# Altium PCB PCB1.PcbDoc (part 5 of 6)
Units mm, origin at the board's own origin, x right, y up, seen from the top; angles counter-clockwise.
Board outline 1473.2 x 504.06 mm, 4 copper layers (Top Layer, MidLayer1, MidLayer2, Bottom Layer); 162 components, 222 nets, 4894 pads, 2213 vias.
Unrouted connection lines stored in the file: 216.
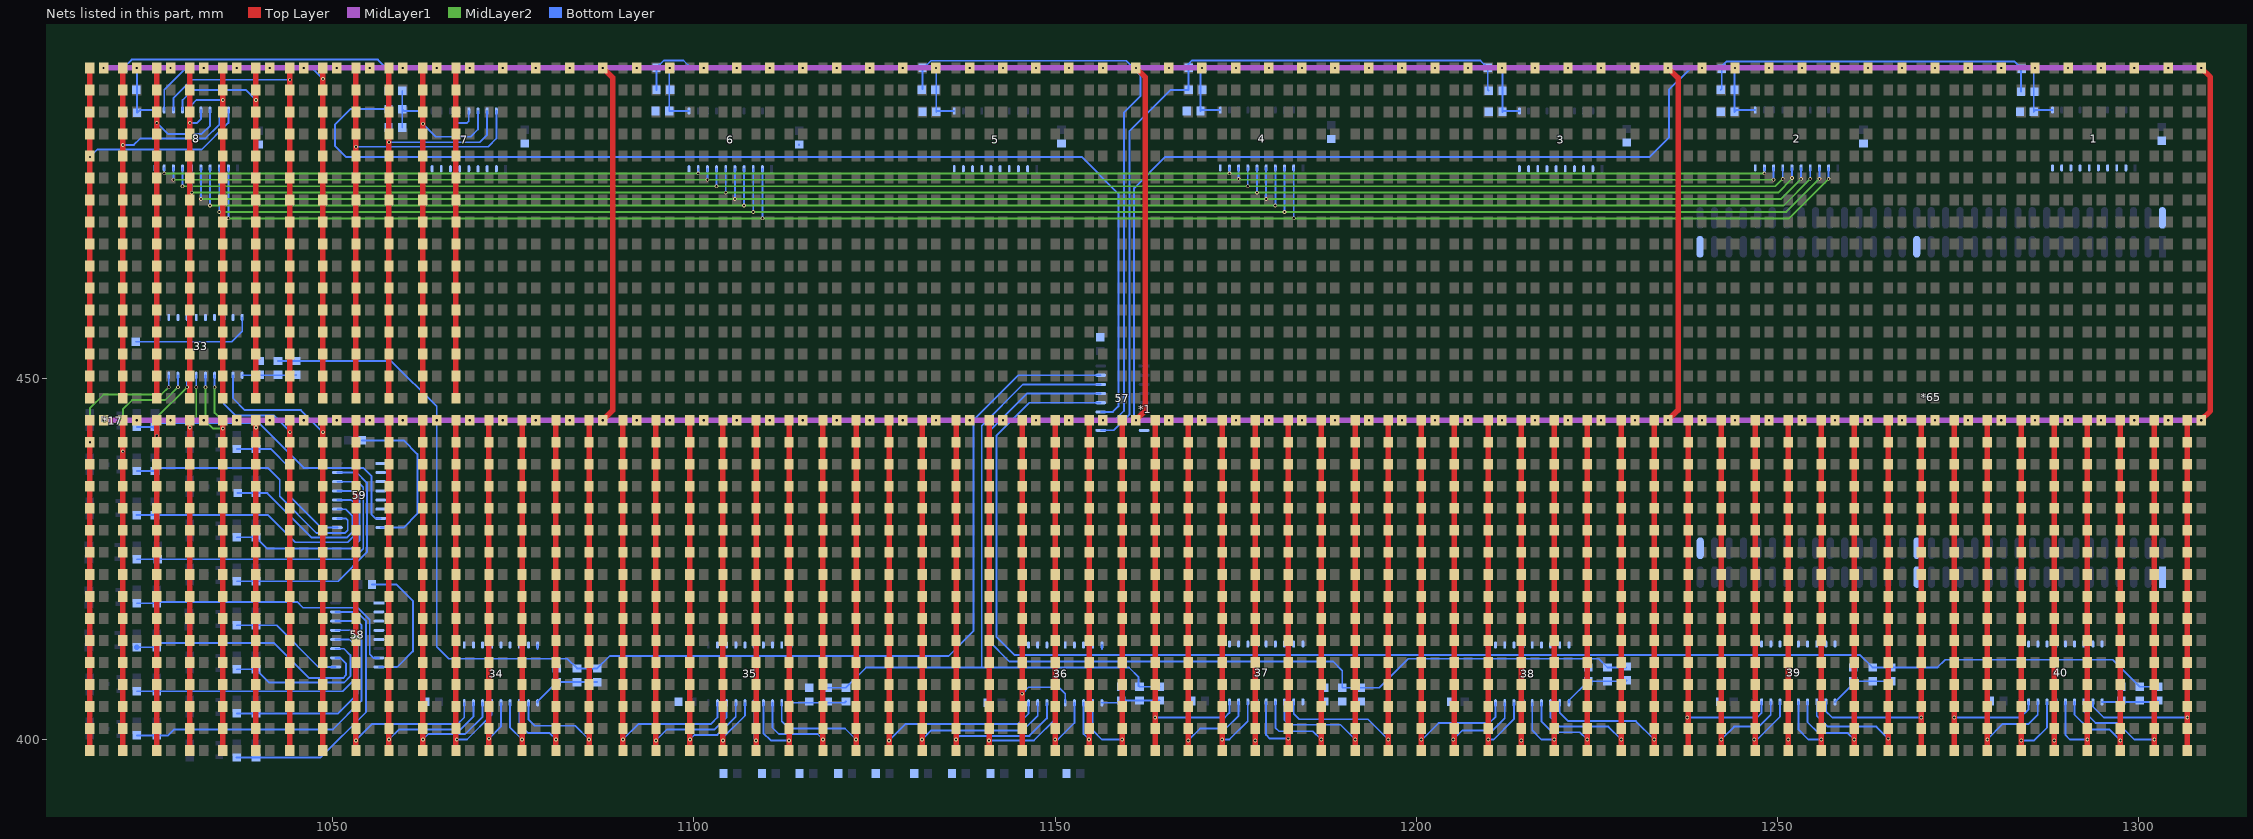
[diagram p7: the nets of this part, all layers, seen from the top]

## Via types
v1: diameter 0.508, hole 0.305, Top Layer to MidLayer1, 2032 vias
v2: diameter 0.508, hole 0.305, Top Layer to Bottom Layer, 143 vias
v3: diameter 0.508, hole 0.305, MidLayer2 to Bottom Layer, 38 vias

## Nets (pads, with @x,y where several pads share a name; then routed paths per layer and width w, separated by ;. In a path a pad name is that pad's centre, name@x,y a point inside that pad or via, vN(x,y) a via of type N, cw(c..) or ccw(c..) an arc to the next point about the centre after c; other vN are vias at no path point) (continued)
AOD15: *1.80 *17.1 | length 780.1
  Top Layer w0.762: v1(1087.379,444.246) 1088.771,445.638 1088.771,491.622 v1(1087.379,493.014) ; v1(1161.166,444.246) 1162.441,445.521 1162.441,491.739 v1(1161.166,493.014) ; v1(1234.826,444.246) 1236.218,445.638 1236.218,491.622 v1(1234.826,493.014) ; v1(1308.613,444.246) 1309.888,445.521 1309.888,491.739 v1(1308.613,493.014)
  MidLayer1 w0.762: v2(1018.286,444.246) v1(1022.863,444.246) v1(1027.562,444.246) v1(1032.134,444.246) v1(1036.701,444.246) v1(1041.278,444.246) v1(1045.977,444.246) v1(1050.549,444.246) v1(1055.116,444.246) v1(1059.693,444.246) v1(1064.392,444.246) v1(1068.964,444.246) v1(1073.531,444.246) v1(1078.108,444.246) v1(1082.807,444.246) v1(1087.379,444.246) v1(1092.073,444.246) v1(1096.65,444.246) v1(1101.349,444.246) v1(1105.921,444.246) v1(1110.488,444.246) v1(1115.065,444.246) v1(1119.764,444.246) v1(1124.336,444.246) v1(1128.903,444.246) v1(1133.48,444.246) v1(1138.179,444.246) v1(1142.751,444.246) v1(1147.318,444.246) v1(1151.895,444.246) v1(1156.594,444.246) v1(1161.166,444.246) v1(1165.733,444.246) v1(1170.31,444.246) v1(1175.009,444.246) v1(1179.581,444.246) v1(1184.148,444.246) v1(1188.725,444.246) v1(1193.424,444.246) v1(1197.996,444.246) v1(1202.563,444.246) v1(1207.14,444.246) v1(1211.839,444.246) v1(1216.411,444.246) v1(1220.978,444.246) v1(1225.555,444.246) v1(1230.254,444.246) v1(1234.826,444.246) v1(1239.52,444.246) v1(1244.097,444.246) v1(1248.796,444.246) v1(1253.368,444.246) v1(1257.935,444.246) v1(1262.512,444.246) v1(1267.211,444.246) v1(1271.783,444.246) v1(1276.35,444.246) v1(1280.927,444.246) v1(1285.626,444.246) v1(1290.198,444.246) v1(1294.765,444.246) v1(1299.342,444.246) v1(1304.041,444.246) v1(1308.613,444.246) ; v1(1018.286,493.014) v1(1022.863,493.014) v1(1027.562,493.014) v1(1032.134,493.014) v1(1036.701,493.014) v1(1041.278,493.014) v1(1045.977,493.014) v1(1050.549,493.014) v1(1055.116,493.014) v1(1059.693,493.014) v1(1064.392,493.014) v1(1068.964,493.014) v1(1073.531,493.014) v1(1078.108,493.014) v1(1082.807,493.014) v1(1087.379,493.014) v1(1092.073,493.014) v1(1096.65,493.014) v1(1101.349,493.014) v1(1105.921,493.014) v1(1110.488,493.014) v1(1115.065,493.014) v1(1119.764,493.014) v1(1124.336,493.014) v1(1128.903,493.014) v1(1133.48,493.014) v1(1138.179,493.014) v1(1142.751,493.014) v1(1147.318,493.014) v1(1151.895,493.014) v1(1156.594,493.014) v1(1161.166,493.014) v1(1165.733,493.014) v1(1170.31,493.014) v1(1175.009,493.014) v1(1179.581,493.014) v1(1184.148,493.014) v1(1188.725,493.014) v1(1193.424,493.014) v1(1197.996,493.014) v1(1202.563,493.014) v1(1207.14,493.014) v1(1211.839,493.014) v1(1216.411,493.014) v1(1220.978,493.014) v1(1225.555,493.014) v1(1230.254,493.014) v1(1234.826,493.014) v1(1239.52,493.014) v1(1244.097,493.014) v1(1248.796,493.014) v1(1253.368,493.014) v1(1257.935,493.014) v1(1262.512,493.014) v1(1267.211,493.014) v1(1271.783,493.014) v1(1276.35,493.014) v1(1280.927,493.014) v1(1285.626,493.014) v1(1290.198,493.014) v1(1294.765,493.014) v1(1299.342,493.014) v1(1304.041,493.014) v1(1308.613,493.014)
AOG0: 13.2 17.1 58.15 | length 37.8
  Bottom Layer w0.254: 17.1@1036.696,397.576 13.2@1039.368,397.576 1048.324,397.576 1054.608,403.86 1054.608,416.433 1053.338,417.703 58.15@1050.386,417.703
AOG1: 14.2 18.1 58.14 | length 47.4
  Bottom Layer w0.254: 18.1@1022.863,400.624 1027.242,400.624 1028.065,401.447 1050.036,401.447 1053.973,405.384 1053.973,415.925 1053.465,416.433 58.14@1050.386,416.433
AOG2: 15.2 19.1 58.13 | length 29.4
  Bottom Layer w0.254: 19.1@1036.701,403.672 1050.737,403.672 1053.465,406.4 1053.465,414.528 1052.83,415.163 58.13@1050.386,415.163
AOG3: 16.2 20.1 58.12 | length 38.5
  Bottom Layer w0.254: 20.1@1022.863,406.72 1051.372,406.72 1052.957,408.305 1052.957,413.258 1052.322,413.893 58.12@1050.386,413.893
AOG4: 25.2 29.1 58.11 | length 22.2
  Bottom Layer w0.254: 29.1@1036.701,409.768 25.2@1039.368,409.768 1041.212,407.924 1051.56,407.924 1052.449,408.813 1052.449,411.734 1051.56,412.623 58.11@1050.386,412.623
AOG5: 26.2 30.1 58.10 | length 34.7
  Bottom Layer w0.254: 26.2@1022.863,412.816 30.1@1025.652,412.816 1026.221,413.385 1041.908,413.385 1046.734,408.559 1051.433,408.559 1051.814,408.94 1051.814,410.591 1051.052,411.353 58.10@1050.386,411.353
AOG6: 27.2 31.1 58.9 | length 16.1
  Bottom Layer w0.254: 31.1@1036.701,415.864 27.2@1039.368,415.864 1042.223,415.864 1048.004,410.083 58.9@1050.386,410.083
AOG7: 28.2 32.1 58.7 | length 39.6
  Bottom Layer w0.254: 32.1@1022.863,418.912 28.2@1025.652,418.912 1025.84,419.1 1045.073,419.1 1045.879,418.294 1053.465,418.294 1055.116,416.643 1055.116,411.861 1055.624,411.353 58.7@1056.386,411.353
AOG8: 45.2 49.1 59.15 | length 34
  Bottom Layer w0.254: 49.1@1036.701,421.96 1050.737,421.96 1054.735,425.958 1054.735,435.61 1053.338,437.007 59.15@1050.64,437.007
AOG9: 46.2 50.1 59.14 | length 44.4
  Bottom Layer w0.254: 50.1@1022.863,425.008 1052.769,425.008 1054.227,426.466 1054.227,434.975 1053.465,435.737 59.14@1050.64,435.737
AOG10: 47.2 51.1 59.13 | length 27.6
  Bottom Layer w0.254: 51.1@1036.701,428.056 47.2@1039.368,428.056 1040.958,426.466 1052.576,426.466 1053.719,427.609 1053.719,433.705 1052.957,434.467 59.13@1050.64,434.467
AOG11: 48.2 52.1 59.12 | length 39.3
  Bottom Layer w0.254: 48.2@1022.853,431.104 1041.08,431.104 1044.829,427.355 1052.068,427.355 1053.211,428.498 1053.211,432.562 1052.576,433.197 59.12@1050.64,433.197
AOG12: 59.11 60.2 64.1 | length 23.5
  Bottom Layer w0.254: 60.2@1036.828,434.152 1040.953,434.152 1047.115,427.99 1051.941,427.99 1052.703,428.752 1052.703,431.038 1051.814,431.927 59.11@1050.64,431.927
AOG13: 59.10 61.2 65.1 | length 37.6
  Bottom Layer w0.254: 61.2@1022.863,437.2 65.1@1025.398,437.2 1025.84,437.642 1041.019,437.642 1042.67,435.991 1042.67,433.705 1047.75,428.625 1051.687,428.625 1052.068,429.006 1052.068,430.403 1051.814,430.657 59.10@1050.64,430.657
AOG14: 59.9 62.2 66.1 | length 20.7
  Bottom Layer w0.254: 62.2@1036.701,440.248 1041.461,440.248 1043.94,437.769 1043.94,433.832 1048.385,429.387 59.9@1050.64,429.387
AOG15: 59.7 63.2 67.1 | length 42.6
  Bottom Layer w0.254: 63.2@1022.863,443.296 67.1@1025.398,443.296 1025.967,443.865 1039.749,443.865 1045.972,437.642 1054.227,437.642 1055.37,436.499 1055.37,431.165 1055.878,430.657 59.7@1056.64,430.657
CLK1: 34.11 *19.2 *21.2 *.2 | length 9.6
  Bottom Layer w0.254: 34.11@1078.357,405.131 1078.357,405.323 *21.2@1081.024,407.99 *19.2@1083.818,407.99 *.2@1086.612,407.99
CLK1_: 33.11 *41.2 *43.2 *45.2 | length 7.5
  Bottom Layer w0.254: 33.11@1037.463,450.47 1044.891,450.47 *41.2@1044.956,450.535
CLK2: 36.11 *18.2 *20.2 *22.2 | length 7.9
  Bottom Layer w0.254: 36.11@1156.462,405.131 36.11@1156.462,405.131 *22.2@1159.002,405.13 ; *22.2@1159.129,405.45 *18.2@1161.669,405.45 *20.2@1164.463,405.45
CLK2_: 35.11 *42.2 *44.2 *46.2 | length 7.7
  Bottom Layer w0.254: 35.11@1113.409,405.131 1120.837,405.131 *42.2@1121.029,405.323
CLK3: 38.11 *23.2 *25.2 *27.2 | length 9.5
  Bottom Layer w0.254: 38.11@1221.105,405.131 1221.105,405.45 *27.2@1223.772,408.117 *25.2@1226.439,408.117 1228.979,408.117 *23.2@1229.106,408.244
CLK3_: 37.11 *47.2 *49.2 *51.2
CLK4: 39.11 *24.2 *26.2 *28.2 | length 9.1
  Bottom Layer w0.254: 39.11@1257.935,405.258 1260.475,407.798 *28.2@1260.475,408.117 *26.2@1263.142,408.117 *24.2@1265.682,408.117
CLK4_: 40.11 *48.2 *50.2 *52.2 | length 7.8
  Bottom Layer w0.254: 40.11@1294.892,405.258 1302.447,405.258 *48.2@1302.639,405.45
CLK5: 7.11 *29.2 *31.2 *33.2 | length 8
  Bottom Layer w0.254: *33.2@1059.622,484.759 *31.2@1059.622,487.299 ; *29.2@1059.622,489.839 *31.2@1059.622,487.299 ; 7.11@1062.482,487.044 1059.877,487.044 *31.2@1059.622,487.299
CLK5_: 8.11 *53.2 *55.2 *57.2 | length 8.9
  Bottom Layer w0.254: *53.2@1022.919,493.014 *57.2@1022.919,486.791 1023.299,487.171 8.11@1025.398,487.171
CLK6: 5.11 *30.2 *32.2 *34.2 | length 8.6
  Bottom Layer w0.254: *30.2@1133.536,493.014 *34.2@1133.536,486.918 1133.662,487.044 5.11@1136.015,487.044
CLK6_: 6.11 *54.2 *56.2 *58.2 | length 8.8
  Bottom Layer w0.254: *56.2@1096.706,493.014 1096.579,492.887 *58.2@1096.579,487.045 *58.2@1096.579,487.045 6.11@1099.312,487.044
CLK7: 3.11 *35.2 *37.2 *39.2 | length 8.6
  Bottom Layer w0.254: *35.2@1211.768,493.014 1211.895,492.887 *37.2@1211.895,489.839 *39.2@1211.895,486.918 1212.021,487.044 3.11@1214.247,487.044
CLK7_: 4.11 *59.2 *61.2 *63.2 | length 8.9
  Bottom Layer w0.254: *59.2@1170.366,493.014 1170.112,492.76 *63.2@1170.112,487.045 1170.238,487.171 4.11@1172.845,487.171
CLK8: 2.11 *36.2 *38.2 *40.2 | length 9
  Bottom Layer w0.254: *36.2@1244.153,492.887 1244.026,492.76 *38.2@1244.026,489.966 *40.2@1244.026,486.918 1244.279,487.171 2.11@1246.886,487.171
CLK8_: 1.11 *60.2 *62.2 *64.2 | length 8.8
  Bottom Layer w0.254: *62.2@1285.682,492.887 1285.428,492.633 *64.2@1285.428,486.918 1285.681,487.171 1.11@1288.034,487.171
CLKG1: 57.15 *19.1 *41.1 *43.1 *.1 | length 184.9
  Bottom Layer w0.254: *43.1@1042.416,452.435 *41.1@1044.956,452.435 1058.103,452.435 1064.387,446.151 1064.387,412.877 1066.038,411.226 1082.482,411.226 *19.1@1083.818,409.89 *.1@1086.612,409.89 1088.329,411.607 1135.253,411.607 1138.682,415.036 1138.682,444.246 1144.905,450.469 57.15@1156.304,450.469
CLKG2: 57.14 *18.1 *20.1 *42.1 *44.1 | length 101.3
  Bottom Layer w0.254: *44.1@1118.489,407.223 *42.1@1121.029,407.223 1123.823,410.017 1139.698,410.017 ; 57.14@1156.304,449.199 1145.54,449.199 1139.825,443.484 1139.825,410.144 1139.698,410.017 ; *20.1@1164.463,407.35 *18.1@1161.669,407.35 1161.542,407.477 1161.542,408.686 1160.211,410.017 1139.698,410.017
CLKG3: 57.13 *23.1 *25.1 *47.1 *49.1 | length 141.1
  Bottom Layer w0.254: 57.13@1156.304,447.929 1146.048,447.929 1140.714,442.595 1140.714,413.766 1143.635,410.845 1188.466,410.845 1189.736,409.575 *47.1@1189.736,407.223 *49.1@1192.276,407.223 1194.877,407.223 1198.88,411.226 1225.23,411.226 *25.1@1226.439,410.017 *23.1@1228.979,410.017
CLKG4: 57.12 *24.1 *26.1 *48.1 *50.1 | length 208.7
  Bottom Layer w0.254: 57.12@1156.304,446.659 1146.429,446.659 1141.857,442.087 1141.857,414.274 1144.397,411.734 1261.425,411.734 *26.1@1263.142,410.017 *24.1@1265.682,410.017 1272.093,410.017 1273.175,411.099 1296.35,411.099 *50.1@1300.099,407.35 *48.1@1302.639,407.35
CLKG5: 57.11 *29.1 *31.1 *53.1 *55.1 | length 200.9
  Bottom Layer w0.254: *55.1@1020.892,489.966 1020.892,492.887 *53.1@1021.019,493.014 1022.162,494.157 1056.259,494.157 1057.722,492.694 *29.1@1057.722,489.839 *31.1@1057.722,487.299 1052.449,487.299 1050.29,485.14 1050.29,482.219 1051.814,480.695 1153.668,480.695 1158.748,475.615 1158.748,446.151 1157.986,445.389 57.11@1156.304,445.389
CLKG6: 57.10 *30.1 *32.1 *54.1 *56.1 | length 126.2
  Bottom Layer w0.254: *54.1@1094.806,489.966 *56.1@1094.806,493.014 1095.822,494.03 1098.55,494.03 1099.566,493.014 *30.1@1131.636,493.014 ; *32.1@1131.636,490.093 *30.1@1131.636,493.014 ; 57.10@1156.304,444.119 1158.113,444.119 1159.51,445.516 1159.51,486.791 1161.796,489.077 1161.796,491.998 1159.799,493.995 1132.808,493.995 1131.827,493.014 *30.1@1131.636,493.014
CLKG7: 57.9 *35.1 *37.1 *59.1 *61.1 | length 103.5
  Bottom Layer w0.254: 57.9@1156.304,442.849 1158.113,442.849 1160.272,445.008 1160.272,484.251 1165.987,489.966 *61.1@1168.466,489.966 *59.1@1168.466,493.014 1168.466,493.588 1168.908,494.03 1208.852,494.03 *35.1@1209.868,493.014 1209.868,489.966 *37.1@1209.995,489.839
CLKG8: 57.7 *36.1 *38.1 *60.1 *62.1 | length 174.1
  Bottom Layer w0.254: 57.7@1162.304,444.119 1161.542,444.119 1160.907,444.754 1160.907,476.377 1165.225,480.695 1232.281,480.695 1234.948,483.362 1234.948,489.966 1237.869,492.887 *36.1@1242.253,492.887 ; *38.1@1242.126,489.966 1242.253,490.093 *36.1@1242.253,492.887 ; *60.1@1283.655,489.712 1283.655,492.76 *62.1@1283.782,492.887 1282.766,493.903 1242.949,493.903 1242.253,493.207 *36.1@1242.253,492.887
GND: 1.10 2.10 3.10 4.10 5.10 6.10 7.10 8.10 33.10 34.10 35.10 36.10 37.10 38.10 39.10 40.10 57.8 58.5 58.8 59.4 59.5 59.8 68.2 69.2 70.2 71.2 72.2 73.2 74.2 75.2 76.2 77.2 78.2 79.2 80.2 81.2 82.2 83.2 84.2 85.2 86.2 87.2 88.2 89.2 90.2 91.2 92.2 93.2 94.2 95.2 96.2 *21.1 *22.1 *27.1 *28.1 *33.1 *34.1 *39.1 *40.1 *45.1 *46.1 *51.1 *52.1 *57.1 *58.1 *63.1 *64.1 *65.1 *65.18 *65.34 *65.49 *65.84 *65.99 *65.132 | length 60.2
  Bottom Layer w0.254: 79.2@1022.731,455.102 1036,455.102 1037.463,456.565 33.10@1037.463,458.47 ; 96.2@1054.034,441.452 1059.815,441.452 1061.72,439.547 1061.72,431.292 1059.815,429.387 59.8@1056.64,429.387 ; 80.2@1055.431,421.513 1058.799,421.513 1061.085,419.227 1061.085,412.242 1058.926,410.083 58.8@1056.386,410.083 ; 1078.357,412.557 34.10@1078.357,413.131 ; 92.2@1114.552,482.346 92.2@1114.552,482.412 ; 1156.462,412.557 36.10@1156.462,413.131
INPUT0: 2.2 4.2 6.2 8.2 33.2 35.2 37.2 39.2 | length 246.1
  MidLayer2 w0.254: v3(1035.558,472.186) 1251.585,472.186 v3(1257.046,477.647)
  Bottom Layer w0.254: v3(1035.558,472.186) 8.2@1035.558,479.171 ; v3(1109.472,472.186) 6.2@1109.472,479.044 ; v3(1183.005,472.186) 4.2@1183.005,479.171 ; v3(1257.046,477.647) 2.2@1257.046,479.171
INPUT1: 2.3 4.3 6.3 8.3 33.3 35.3 37.3 39.3 | length 243.1
  MidLayer2 w0.254: v3(1034.288,473.075) 1251.204,473.075 v3(1255.776,477.647)
  Bottom Layer w0.254: v3(1034.288,473.075) 8.3@1034.288,479.171 ; v3(1108.202,473.075) 6.3@1108.202,479.044 ; v3(1181.735,473.075) 4.3@1181.735,479.171 ; v3(1255.776,477.647) 2.3@1255.776,479.171
INPUT2: 2.4 4.4 6.4 8.4 33.4 35.4 37.4 39.4 | length 240
  MidLayer2 w0.254: v3(1033.018,473.964) 1250.823,473.964 v3(1254.506,477.647)
  Bottom Layer w0.254: v3(1033.018,473.964) 8.4@1033.018,479.171 ; v3(1106.932,473.964) 6.4@1106.932,479.044 ; v3(1180.465,473.964) 4.4@1180.465,479.171 ; v3(1254.506,477.647) 2.4@1254.506,479.171
INPUT3: 2.5 4.5 6.5 8.5 33.5 35.5 37.5 39.5 | length 237
  MidLayer2 w0.254: v3(1031.748,474.853) 1250.442,474.853 v3(1253.236,477.647)
  Bottom Layer w0.254: v3(1031.748,474.853) 8.5@1031.748,479.171 ; v3(1105.662,474.853) 6.5@1105.662,479.044 ; v3(1179.195,474.853) 4.5@1179.195,479.171 ; v3(1253.236,477.647) 2.5@1253.236,479.171
INPUT4: 2.6 4.6 6.6 8.6 33.6 35.6 37.6 39.6 | length 234
  MidLayer2 w0.254: v3(1030.478,475.742) 1250.061,475.742 v3@1251.966,477.647
  Bottom Layer w0.254: v3(1030.478,475.742) 8.6@1030.478,479.171 ; v3(1104.392,475.742) 6.6@1104.392,479.044 ; v3(1177.925,475.742) 4.6@1177.925,479.171 ; v3@1251.966,477.647 2.6@1251.966,479.171
  other v3: 1251.966,477.774
INPUT5: 2.7 4.7 6.7 8.7 33.7 35.7 37.7 39.7 | length 230.9
  MidLayer2 w0.254: v3(1029.208,476.631) 1249.68,476.631 v3(1250.696,477.647)
  Bottom Layer w0.254: v3(1029.208,476.631) 8.7@1029.208,479.171 ; v3(1103.122,476.631) 6.7@1103.122,479.044 ; v3(1176.655,476.631) 4.7@1176.655,479.171 ; v3(1250.696,477.647) 2.7@1250.696,479.171
INPUT6: 2.8 4.8 6.8 8.8 33.8 35.8 37.8 39.8 | length 227.7
  MidLayer2 w0.254: v3(1027.938,477.52) v3(1249.426,477.52)
  Bottom Layer w0.254: v3(1027.938,477.52) 8.8@1027.938,479.171 ; v3(1101.852,477.52) 6.8@1101.852,479.044 ; v3(1175.385,477.647) 4.8@1175.385,479.171 ; v3@1249.426,477.647 2.8@1249.426,479.171
INPUT7: 2.9 4.9 6.9 8.9 33.9 35.9 37.9 39.9 | length 224.4
  MidLayer2 w0.254: v3(1026.668,478.409) v3(1248.156,478.409)
  Bottom Layer w0.254: v3(1026.668,478.409) 8.9@1026.668,479.171 ; v3(1100.582,478.409) 6.9@1100.582,479.044 ; v3(1174.115,478.409) 4.9@1174.115,479.171 ; v3(1248.156,478.409) 2.9@1248.156,479.171
INPUT8: 1.2 3.2 5.2 7.2 34.2 36.2 38.2 40.2
INPUT9: 1.3 3.3 5.3 7.3 34.3 36.3 38.3 40.3
INPUT10: 1.4 3.4 5.4 7.4 34.4 36.4 38.4 40.4
INPUT11: 1.5 3.5 5.5 7.5 34.5 36.5 38.5 40.5
INPUT12: 1.6 3.6 5.6 7.6 34.6 36.6 38.6 40.6
INPUT13: 1.7 3.7 5.7 7.7 34.7 36.7 38.7 40.7
INPUT14: 1.8 3.8 5.8 7.8 34.8 36.8 38.8 40.8
INPUT15: 1.9 3.9 5.9 7.9 34.9 36.9 38.9 40.9
Net58_1: 58.1 59.1
Net58_2: 58.2 59.2
Net58_3: 58.3 59.3
Net58_4: 58.4 59.6
Net*1_1: 33.19 *1.1 | length 67.3
  Top Layer w0.762: *1.1@1016.381,398.653 *1.1@1016.381,423.037 ; *1.1@1016.381,444.373 *1.1@1016.381,444.246 v2(1016.381,441.198) *1.1@1016.381,438.15 *1.1@1016.381,435.102 *1.1@1016.381,432.054 *1.1@1016.381,429.006 *1.1@1016.381,426.085 ; *1.1@1016.381,423.037 *1.1@1016.381,426.085 ; *1.1@1016.381,423.037 *1.1@1016.381,425.958 *1.1@1016.381,426.085
  MidLayer2 w0.254: v2(1016.381,441.198) 1016.381,445.897 1018.286,447.802 1026.287,447.802 v3(1027.303,448.818)
  Bottom Layer w0.254: v3(1027.303,448.818) 33.19@1027.303,450.47
Net*1_2: 33.18 *1.2 | length 62.1
  Top Layer w0.762: *1.2@1020.953,398.653 *1.2@1020.953,422.91 *1.2@1020.953,425.958 *1.2@1020.953,429.006 *1.2@1020.953,432.054 *1.2@1020.953,435.102 *1.2@1020.953,438.15 *1.2@1020.953,441.198 *1.2@1020.953,444.246 *1.2@1020.953,444.373
  MidLayer2 w0.254: v2(1020.953,439.928) 1020.953,445.77 1022.223,447.04 1026.795,447.04 v3(1028.573,448.818)
  Bottom Layer w0.254: v3(1028.573,448.818) 33.18@1028.573,450.47
Net*1_3: 33.17 *1.3 | length 55.8
  Top Layer w0.762: *1.3@1025.652,398.653 *1.3@1025.652,422.91 *1.3@1025.652,425.958 *1.3@1025.652,429.006 *1.3@1025.652,432.054 *1.3@1025.652,435.102 *1.3@1025.652,438.15 *1.3@1025.652,441.198 *1.3@1025.652,444.246 *1.3@1025.652,444.373
  MidLayer2 w0.254: v2(1025.652,442.087) 1025.652,444.627 v3(1029.843,448.818)
  Bottom Layer w0.254: v3(1029.843,448.818) 33.17@1029.843,450.47
Net*1_4: 33.16 *1.4 | length 53.3
  Top Layer w0.762: *1.4@1030.224,398.653 *1.4@1030.224,422.91 *1.4@1030.224,425.958 *1.4@1030.224,429.006 *1.4@1030.224,432.054 *1.4@1030.224,435.102 *1.4@1030.224,438.15 *1.4@1030.224,441.198 *1.4@1030.224,444.246 *1.4@1030.224,444.373
  MidLayer2 w0.254: v2(1030.224,443.23) 1030.224,443.357 1031.113,444.246 v3(1031.113,448.818)
  Bottom Layer w0.254: v3(1031.113,448.818) 33.16@1031.113,450.47
Net*1_5: 33.15 *1.5 | length 54.9
  Top Layer w0.762: *1.5@1034.796,398.653 *1.5@1034.796,401.574 *1.5@1034.796,404.622 *1.5@1034.796,407.67 *1.5@1034.796,410.718 *1.5@1034.796,413.766 *1.5@1034.796,416.814 *1.5@1034.796,419.862 *1.5@1034.796,422.91 *1.5@1034.796,425.958 *1.5@1034.796,429.006 *1.5@1034.796,432.054 *1.5@1034.796,435.102 *1.5@1034.796,438.15 *1.5@1034.796,441.198 *1.5@1034.796,444.246 *1.5@1034.796,444.373
  MidLayer2 w0.254: v3(1032.383,448.818) 1032.383,444.119 1033.399,443.103 v2(1034.796,443.103)
  Bottom Layer w0.254: v3(1032.383,448.818) 33.15@1032.383,450.47
Net*1_6: 33.14 *1.6 | length 57.5
  Top Layer w0.762: *1.6@1039.368,398.653 *1.6@1039.368,401.574 *1.6@1039.368,404.622 *1.6@1039.368,407.67 *1.6@1039.368,410.718 *1.6@1039.368,413.766 *1.6@1039.368,416.814 *1.6@1039.368,419.862 *1.6@1039.368,422.91 *1.6@1039.368,425.958 *1.6@1039.368,429.006 *1.6@1039.368,432.054 *1.6@1039.368,435.102 *1.6@1039.368,438.15 *1.6@1039.368,441.198 *1.6@1039.368,444.246 *1.6@1039.368,444.373
  MidLayer2 w0.254: v3(1033.653,448.818) 1033.653,445.262 1034.796,444.119 1038.479,444.119 v2(1039.368,443.23)
  Bottom Layer w0.254: v3(1033.653,448.818) 33.14@1033.653,450.47
Net*1_7: 33.13 *1.7 | length 60.5
  Top Layer w0.762: *1.7@1044.067,398.653 *1.7@1044.067,401.574 *1.7@1044.067,404.622 *1.7@1044.067,407.67 *1.7@1044.067,410.718 *1.7@1044.067,413.766 *1.7@1044.067,416.814 *1.7@1044.067,419.862 *1.7@1044.067,422.91 *1.7@1044.067,425.958 *1.7@1044.067,429.006 *1.7@1044.067,432.054 *1.7@1044.067,435.102 *1.7@1044.067,438.15 *1.7@1044.067,441.198 *1.7@1044.067,444.246 *1.7@1044.067,444.373
  Bottom Layer w0.254: 33.13@1034.923,450.47 1034.923,446.532 1036.574,444.881 1041.908,444.881 1044.067,442.722 v2(1044.067,442.595)
Net*1_8: 33.12 *1.8 | length 63.3
  Top Layer w0.762: *1.8@1048.639,398.653 *1.8@1048.639,401.574 *1.8@1048.639,404.622 *1.8@1048.639,407.67 *1.8@1048.639,410.718 *1.8@1048.639,413.766 *1.8@1048.639,416.814 *1.8@1048.639,419.862 *1.8@1048.639,422.91 *1.8@1048.639,425.958 *1.8@1048.639,429.006 *1.8@1048.639,432.054 *1.8@1048.639,435.102 *1.8@1048.639,438.15 *1.8@1048.639,441.198 *1.8@1048.639,444.246 *1.8@1048.639,444.373
  Bottom Layer w0.254: 33.12@1036.193,450.47 1036.193,447.294 1037.844,445.643 1045.591,445.643 v2(1048.639,442.595)
Net*1_9: 34.19 *1.9 | length 64.1
  Top Layer w0.762: *1.9@1053.211,398.526 *1.9@1053.211,401.574 *1.9@1053.211,404.622 *1.9@1053.211,407.67 *1.9@1053.211,410.718 *1.9@1053.211,413.766 *1.9@1053.211,416.814 *1.9@1053.211,419.862 *1.9@1053.211,422.91 *1.9@1053.211,425.958 *1.9@1053.211,429.006 *1.9@1053.211,432.054 *1.9@1053.211,435.102 *1.9@1053.211,438.15 *1.9@1053.211,441.198 *1.9@1053.211,444.246
  Bottom Layer w0.254: v2(1053.211,399.923) 1055.497,402.209 1067.308,402.209 1068.197,403.098 34.19@1068.197,405.131
Net*1_10: 34.18 *1.10 | length 60.6
  Top Layer w0.762: *1.10@1057.783,398.526 *1.10@1057.783,401.574 *1.10@1057.783,404.622 *1.10@1057.783,407.67 *1.10@1057.783,410.718 *1.10@1057.783,413.766 *1.10@1057.783,416.814 *1.10@1057.783,419.862 *1.10@1057.783,422.91 *1.10@1057.783,425.958 *1.10@1057.783,429.006 *1.10@1057.783,432.054 *1.10@1057.783,435.102 *1.10@1057.783,438.15 *1.10@1057.783,441.198 *1.10@1057.783,444.246
  Bottom Layer w0.254: v2(1057.783,400.05) 1059.18,401.447 1067.689,401.447 1069.467,403.225 34.18@1069.467,405.131
Net*1_11: 34.17 *1.11 | length 57.2
  Top Layer w0.762: *1.11@1062.482,398.526 *1.11@1062.482,401.574 *1.11@1062.482,404.622 *1.11@1062.482,407.67 *1.11@1062.482,410.718 *1.11@1062.482,413.766 *1.11@1062.482,416.814 *1.11@1062.482,419.862 *1.11@1062.482,422.91 *1.11@1062.482,425.958 *1.11@1062.482,429.006 *1.11@1062.482,432.054 *1.11@1062.482,435.102 *1.11@1062.482,438.15 *1.11@1062.482,441.198 *1.11@1062.482,444.246
  Bottom Layer w0.254: v2(1062.482,400.05) 1063.244,400.812 1068.324,400.812 1070.737,403.225 34.17@1070.737,405.131
Net*1_12: 34.16 *1.12 | length 53.6
  Top Layer w0.762: *1.12@1067.054,398.526 *1.12@1067.054,401.574 *1.12@1067.054,404.622 *1.12@1067.054,407.67 *1.12@1067.054,410.718 *1.12@1067.054,413.766 *1.12@1067.054,416.814 *1.12@1067.054,419.862 *1.12@1067.054,422.91 *1.12@1067.054,425.958 *1.12@1067.054,429.006 *1.12@1067.054,432.054 *1.12@1067.054,435.102 *1.12@1067.054,438.15 *1.12@1067.054,441.198 *1.12@1067.054,444.246
  Bottom Layer w0.254: v2(1067.181,400.05) 1068.578,400.05 1072.007,403.479 34.16@1072.007,405.131
Net*1_13: 34.15 *1.13 | length 51.4
  Top Layer w0.762: *1.13@1071.626,398.526 *1.13@1071.626,401.574 *1.13@1071.626,404.622 *1.13@1071.626,407.67 *1.13@1071.626,410.718 *1.13@1071.626,413.766 *1.13@1071.626,416.814 *1.13@1071.626,419.862 *1.13@1071.626,422.91 *1.13@1071.626,425.958 *1.13@1071.626,429.006 *1.13@1071.626,432.054 *1.13@1071.626,435.102 *1.13@1071.626,438.15 *1.13@1071.626,441.198 *1.13@1071.626,444.246
  Bottom Layer w0.254: v2(1071.626,400.177) 1073.277,401.828 34.15@1073.277,405.131
Net*1_14: 34.14 *1.14 | length 51.5
  Top Layer w0.762: *1.14@1076.198,398.526 *1.14@1076.198,401.574 *1.14@1076.198,404.622 *1.14@1076.198,407.67 *1.14@1076.198,410.718 *1.14@1076.198,413.766 *1.14@1076.198,416.814 *1.14@1076.198,419.862 *1.14@1076.198,422.91 *1.14@1076.198,425.958 *1.14@1076.198,429.006 *1.14@1076.198,432.054 *1.14@1076.198,435.102 *1.14@1076.198,438.15 *1.14@1076.198,441.198 *1.14@1076.198,444.246
  Bottom Layer w0.254: 34.14@1074.547,405.131 1074.547,401.701 v2(1076.198,400.05)
Net*1_15: 34.13 *1.15 | length 54.6
  Top Layer w0.762: *1.15@1080.897,398.526 *1.15@1080.897,401.574 *1.15@1080.897,404.622 *1.15@1080.897,407.67 *1.15@1080.897,410.718 *1.15@1080.897,413.766 *1.15@1080.897,416.814 *1.15@1080.897,419.862 *1.15@1080.897,422.91 *1.15@1080.897,425.958 *1.15@1080.897,429.006 *1.15@1080.897,432.054 *1.15@1080.897,435.102 *1.15@1080.897,438.15 *1.15@1080.897,441.198 *1.15@1080.897,444.246
  Bottom Layer w0.254: 34.13@1075.817,405.131 1075.817,402.209 1077.087,400.939 1080.008,400.939 v2(1080.897,400.05)
Net*1_16: 34.12 *1.16 | length 57.5
  Top Layer w0.762: *1.16@1085.469,398.526 *1.16@1085.469,401.574 *1.16@1085.469,404.622 *1.16@1085.469,407.67 *1.16@1085.469,410.718 *1.16@1085.469,413.766 *1.16@1085.469,416.814 *1.16@1085.469,419.862 *1.16@1085.469,422.91 *1.16@1085.469,425.958 *1.16@1085.469,429.006 *1.16@1085.469,432.054 *1.16@1085.469,435.102 *1.16@1085.469,438.15 *1.16@1085.469,441.198 *1.16@1085.469,444.246
  Bottom Layer w0.254: 34.12@1077.087,405.131 1077.087,402.844 1077.976,401.955 1083.564,401.955 v2(1085.469,400.05)
Net*1_17: 35.19 *1.17 | length 79.9
  Top Layer w0.762: *1.17@1090.168,398.78 *1.17@1090.168,401.574 *1.17@1090.168,404.622 *1.17@1090.168,404.876 ; *1.17@1090.168,410.718 *1.17@1090.168,407.924 ; *1.17@1090.168,416.814 *1.17@1090.168,414.02 ; *1.17@1090.168,432.308 *1.17@1090.168,438.404 ; *1.17@1090.168,435.356 *1.17@1090.168,438.404 ; *1.17@1090.168,444.5 *1.17@1090.168,438.404 ; *1.17@1090.168,404.876 *1.17@1090.168,407.924 ; *1.17@1090.168,404.876 *1.17@1090.168,407.67 *1.17@1090.168,407.924 ; *1.17@1090.168,407.924 *1.17@1090.168,413.766 *1.17@1090.168,414.02 ; *1.17@1090.168,414.02 *1.17@1090.168,419.862 *1.17@1090.168,438.404
  Bottom Layer w0.254: v2(1090.168,400.05) 1092.327,402.209 1102.36,402.209 1103.249,403.098 35.19@1103.249,405.131
Net*1_18: 35.18 *1.18 | length 74.1
  Top Layer w0.762: *1.18@1094.74,398.78 *1.18@1094.74,401.574 *1.18@1094.74,404.622 *1.18@1094.74,404.876 ; *1.18@1094.74,407.924 *1.18@1094.74,404.876 ; *1.18@1094.74,420.116 *1.18@1094.74,417.068 ; *1.18@1094.74,429.26 *1.18@1094.74,435.356 ; *1.18@1094.74,432.308 *1.18@1094.74,435.356 ; *1.18@1094.74,444.5 *1.18@1094.74,435.356 ; *1.18@1094.74,404.876 *1.18@1094.74,417.068 ; *1.18@1094.74,417.068 *1.18@1094.74,435.356
  Bottom Layer w0.254: v2(1094.74,399.923) 1096.264,401.447 1102.868,401.447 1104.519,403.098 35.18@1104.519,405.131
Net*1_19: 35.17 *1.19 | length 58.3
  Top Layer w0.762: *1.19@1099.439,398.78 *1.19@1099.439,401.574 *1.19@1099.439,407.924 ; *1.19@1099.439,410.972 *1.19@1099.439,407.924 ; *1.19@1099.439,444.5 1099.439,435.356 *1.19@1099.439,407.924
  Bottom Layer w0.254: v2(1099.439,400.05) 1100.074,400.685 1103.249,400.685 1105.789,403.225 35.17@1105.789,405.131
Net*1_20: 35.16 *1.20 | length 61.3
  Top Layer w0.762: *1.20@1104.011,398.78 *1.20@1104.011,401.574 *1.20@1104.011,404.622 *1.20@1104.011,420.116 ; *1.20@1104.011,417.068 *1.20@1104.011,420.116 ; *1.20@1104.011,423.164 *1.20@1104.011,420.116 ; *1.20@1104.011,438.404 *1.20@1104.011,435.356 ; *1.20@1104.011,444.5 *1.20@1104.011,435.356 ; *1.20@1104.011,420.116 *1.20@1104.011,435.356
  Bottom Layer w0.254: v2(1104.011,399.923) 1104.011,400.304 1107.059,403.352 35.16@1107.059,405.131
Net*1_21: 35.15 *1.21 | length 60.2
  Top Layer w0.762: *1.21@1108.583,398.78 *1.21@1108.583,401.574 *1.21@1108.583,404.622 *1.21@1108.583,407.67 *1.21@1108.583,420.116 ; *1.21@1108.583,417.068 *1.21@1108.583,420.116 ; *1.21@1108.583,423.164 *1.21@1108.583,420.116 ; *1.21@1108.583,438.404 *1.21@1108.583,435.356 ; *1.21@1108.583,444.5 *1.21@1108.583,435.356 ; *1.21@1108.583,420.116 *1.21@1108.583,435.356
  Bottom Layer w0.254: 35.15@1108.329,405.131 1108.329,400.177 v2(1108.583,399.923)
Net*1_22: 35.14 *1.22 | length 63
  Top Layer w0.762: *1.22@1113.155,398.78 *1.22@1113.155,401.574 *1.22@1113.155,420.116 ; *1.22@1113.155,417.068 *1.22@1113.155,420.116 ; *1.22@1113.155,423.164 *1.22@1113.155,420.116 ; *1.22@1113.155,438.404 *1.22@1113.155,435.356 ; *1.22@1113.155,444.5 *1.22@1113.155,435.356 ; *1.22@1113.155,420.116 *1.22@1113.155,435.356
  Bottom Layer w0.254: 35.14@1109.599,405.131 1109.599,400.939 1110.615,399.923 v2(1113.155,399.923)
Net*1_23: 35.13 *1.23 | length 72.1
  Top Layer w0.762: *1.23@1117.854,398.78 *1.23@1117.854,401.574 *1.23@1117.854,417.068 ; *1.23@1117.854,414.02 *1.23@1117.854,417.068 ; *1.23@1117.854,420.116 *1.23@1117.854,417.068 ; *1.23@1117.854,429.26 *1.23@1117.854,435.356 ; *1.23@1117.854,432.308 *1.23@1117.854,435.356 ; *1.23@1117.854,444.5 *1.23@1117.854,435.356 ; *1.23@1117.854,417.068 *1.23@1117.854,435.356
  Bottom Layer w0.254: 35.13@1110.869,405.131 1110.869,401.701 1111.758,400.812 1117.092,400.812 v2(1117.854,400.05)
Net*1_24: 35.12 *1.24 | length 80.9
  Top Layer w0.762: *1.24@1122.426,398.78 *1.24@1122.426,401.574 *1.24@1122.426,404.622 *1.24@1122.426,404.876 ; *1.24@1122.426,407.924 *1.24@1122.426,404.876 ; *1.24@1122.426,417.068 *1.24@1122.426,414.02 ; *1.24@1122.426,420.116 *1.24@1122.426,414.02 ; *1.24@1122.426,429.26 *1.24@1122.426,435.356 ; *1.24@1122.426,432.308 *1.24@1122.426,435.356 ; *1.24@1122.426,444.5 *1.24@1122.426,435.356 ; *1.24@1122.426,404.876 *1.24@1122.426,414.02 ; *1.24@1122.426,414.02 *1.24@1122.426,435.356
  Bottom Layer w0.254: 35.12@1112.139,405.131 1112.139,402.59 1113.155,401.574 1120.902,401.574 v2(1122.426,400.05)
Net*1_25: 36.19 *1.25 | length 68.1
  Top Layer w0.762: *1.25@1126.998,398.653 *1.25@1126.998,401.574 *1.25@1126.998,404.622 1126.998,423.037 *1.25@1126.998,444.373
  Bottom Layer w0.254: v2(1126.998,399.923) 1129.284,402.209 1144.905,402.209 1146.302,403.606 36.19@1146.302,405.131
Net*1_26: 36.18 *1.26 | length 64.9
  Top Layer w0.762: *1.26@1131.57,398.653 *1.26@1131.57,401.574 *1.26@1131.57,404.622 1131.57,423.037 *1.26@1131.57,444.373
  Bottom Layer w0.254: v2(1131.57,400.05) 1132.84,401.32 1145.54,401.32 1147.572,403.352 36.18@1147.572,405.131
Net*1_27: 36.17 *1.27 | length 61.7
  Top Layer w0.762: *1.27@1136.269,398.653 *1.27@1136.269,401.574 1136.269,423.037 1136.269,435.229 *1.27@1136.269,444.373
  Bottom Layer w0.254: v2(1136.269,400.05) 1136.777,400.558 1146.429,400.558 1148.842,402.971 36.17@1148.842,405.131
Net*1_28: 36.16 *1.28 | length 58.4
  Top Layer w0.762: *1.28@1140.841,398.653 *1.28@1140.841,401.574 *1.28@1140.841,444.373
  Bottom Layer w0.254: v2(1140.841,399.923) 1147.064,399.923 1150.112,402.971 36.16@1150.112,405.131
Net*1_29: 36.15 *1.29 | length 72
  Top Layer w0.762: *1.29@1145.413,401.574 *1.29@1145.413,398.653 ; *1.29@1145.413,401.701 *1.29@1145.413,398.653 ; *1.29@1145.413,404.622 *1.29@1145.413,404.749 ; *1.29@1145.413,410.845 *1.29@1145.413,410.718 ; *1.29@1145.413,416.814 *1.29@1145.413,413.893 ; *1.29@1145.413,432.181 *1.29@1145.413,438.277 ; *1.29@1145.413,435.229 *1.29@1145.413,438.277 ; *1.29@1145.413,444.373 *1.29@1145.413,438.277 ; *1.29@1145.413,398.653 *1.29@1145.413,404.749 ; *1.29@1145.413,404.749 *1.29@1145.413,407.67 *1.29@1145.413,410.718 ; *1.29@1145.413,410.718 *1.29@1145.413,413.766 *1.29@1145.413,413.893 ; *1.29@1145.413,413.893 *1.29@1145.413,419.862 *1.29@1145.413,438.277
  Bottom Layer w0.254: v2(1145.413,406.4) 1146.302,407.289 1150.493,407.289 1151.382,406.4 36.15@1151.382,405.131
Net*1_30: 36.14 *1.30 | length 52.1
  Top Layer w0.762: *1.30@1149.985,398.653 *1.30@1149.985,401.574 *1.30@1149.985,404.622 *1.30@1149.985,444.373
  Bottom Layer w0.254: v2(1149.985,400.05) 1150.366,400.05 1152.652,402.336 36.14@1152.652,405.131
Net*1_31: 36.13 *1.31 | length 51.1
  Top Layer w0.762: *1.31@1154.684,398.653 *1.31@1154.684,401.574 *1.31@1154.684,444.373
  Bottom Layer w0.254: 36.13@1153.922,405.131 1153.922,400.812 v2(1154.684,400.05)
Net*1_32: 36.12 *1.32 | length 54.1
  Top Layer w0.762: *1.32@1159.256,398.653 *1.32@1159.256,401.574 *1.32@1159.256,444.373
  Bottom Layer w0.254: 36.12@1155.192,405.131 1155.192,401.32 1156.462,400.05 v2(1159.256,400.05)
Net*1_33: 37.19 *1.33 | length 57.8
  Top Layer w0.762: *1.33@1163.828,398.653 *1.33@1163.828,404.622 *1.33@1163.828,444.373
  Bottom Layer w0.254: v2(1163.828,403.098) 1173.48,403.098 1174.115,403.733 37.19@1174.115,405.258
Net*1_34: 37.18 *1.34 | length 56
  Top Layer w0.762: *1.34@1168.4,398.653 *1.34@1168.4,401.574 *1.34@1168.4,404.622 1168.4,423.037 *1.34@1168.4,444.373
  Bottom Layer w0.254: v2(1168.4,399.923) 1170.051,401.574 1173.607,401.574 1175.385,403.352 37.18@1175.385,405.258
Net*1_35: 37.17 *1.35 | length 53
  Top Layer w0.762: *1.35@1173.099,398.653 *1.35@1173.099,401.574 *1.35@1173.099,444.373
  Bottom Layer w0.254: v2(1173.099,400.05) 1174.115,400.05 1176.655,402.59 37.17@1176.655,405.258
Net*1_36: 37.16 *1.36 | length 51.2
  Top Layer w0.762: *1.36@1177.671,398.653 *1.36@1177.671,401.574 *1.36@1177.671,404.622 *1.36@1177.671,407.67 *1.36@1177.671,444.373
  Bottom Layer w0.254: v2(1177.671,399.923) 1177.925,400.177 37.16@1177.925,405.258
Net*1_37: 37.15 *1.37 | length 53.6
  Top Layer w0.762: *1.37@1182.243,398.653 *1.37@1182.243,401.574 *1.37@1182.243,444.373
  Bottom Layer w0.254: 37.15@1179.195,405.258 1179.195,400.685 1179.703,400.177 v2(1182.243,400.177)
Net*1_38: 37.14 *1.38 | length 56.3
  Top Layer w0.762: *1.38@1186.815,398.653 *1.38@1186.815,401.574 *1.38@1186.815,404.622 *1.38@1186.815,407.67 *1.38@1186.815,410.718 *1.38@1186.815,413.766 *1.38@1186.815,416.814 *1.38@1186.815,419.862 *1.38@1186.815,422.91 *1.38@1186.815,425.958 *1.38@1186.815,429.006 *1.38@1186.815,432.054 *1.38@1186.815,435.102 *1.38@1186.815,438.15 *1.38@1186.815,441.198 *1.38@1186.815,444.246 *1.38@1186.815,444.373
  Bottom Layer w0.254: 37.14@1180.465,405.258 1180.465,401.701 1180.973,401.193 1185.672,401.193 v2(1186.815,400.05)
Net*1_39: 37.13 *1.39 | length 59.1
  Top Layer w0.762: *1.39@1191.514,398.653 *1.39@1191.514,401.574 *1.39@1191.514,404.622 1191.514,435.229 *1.39@1191.514,444.373
  Bottom Layer w0.254: 37.13@1181.735,405.258 1181.735,402.717 1182.37,402.082 1189.482,402.082 v2(1191.514,400.05)
Net*1_40: 37.12 *1.40 | length 61.9
  Top Layer w0.762: *1.40@1196.086,398.653 *1.40@1196.086,401.574 *1.40@1196.086,404.622 1196.086,435.229 *1.40@1196.086,444.373
  Bottom Layer w0.254: 37.12@1183.005,405.258 1183.005,403.606 1183.767,402.844 1193.292,402.844 v2(1196.086,400.05)
Net*1_41: 38.19 *1.41 | length 59.2
  Top Layer w0.762: *1.41@1200.658,398.526 *1.41@1200.658,401.574 *1.41@1200.658,404.622 *1.41@1200.658,407.67 *1.41@1200.658,410.718 *1.41@1200.658,413.766 *1.41@1200.658,416.814 *1.41@1200.658,419.862 *1.41@1200.658,422.91 *1.41@1200.658,425.958 *1.41@1200.658,429.006 *1.41@1200.658,432.054 *1.41@1200.658,435.102 *1.41@1200.658,438.15 *1.41@1200.658,441.198 *1.41@1200.658,444.246
  Bottom Layer w0.254: v2(1200.658,400.05) 1200.785,400.05 1203.071,402.336 1210.056,402.336 1210.945,403.225 38.19@1210.945,405.131
Net*1_42: 38.18 *1.42 | length 56.2
  Top Layer w0.762: *1.42@1205.23,398.526 *1.42@1205.23,401.574 *1.42@1205.23,404.622 *1.42@1205.23,407.67 *1.42@1205.23,410.718 *1.42@1205.23,413.766 *1.42@1205.23,416.814 *1.42@1205.23,419.862 *1.42@1205.23,422.91 *1.42@1205.23,425.958 *1.42@1205.23,429.006 *1.42@1205.23,432.054 *1.42@1205.23,435.102 *1.42@1205.23,438.15 *1.42@1205.23,441.198 *1.42@1205.23,444.246
  Bottom Layer w0.254: v2(1205.103,400.05) 1206.373,401.32 1210.564,401.32 1212.215,402.971 38.18@1212.215,405.131
Net*1_43: 38.17 *1.43 | length 52.7
  Top Layer w0.762: *1.43@1209.929,398.526 *1.43@1209.929,401.574 *1.43@1209.929,404.622 *1.43@1209.929,407.67 *1.43@1209.929,410.718 *1.43@1209.929,413.766 *1.43@1209.929,416.814 *1.43@1209.929,419.862 *1.43@1209.929,422.91 *1.43@1209.929,425.958 *1.43@1209.929,429.006 *1.43@1209.929,432.054 *1.43@1209.929,435.102 *1.43@1209.929,438.15 *1.43@1209.929,441.198 *1.43@1209.929,444.246
  Bottom Layer w0.254: v2(1209.929,400.05) 1210.691,400.05 1213.485,402.844 38.17@1213.485,405.131
Net*1_44: 38.16 *1.44 | length 51
  Top Layer w0.762: *1.44@1214.501,398.526 *1.44@1214.501,401.574 *1.44@1214.501,404.622 *1.44@1214.501,407.67 *1.44@1214.501,410.718 *1.44@1214.501,413.766 *1.44@1214.501,416.814 *1.44@1214.501,419.862 *1.44@1214.501,422.91 *1.44@1214.501,425.958 *1.44@1214.501,429.006 *1.44@1214.501,432.054 *1.44@1214.501,435.102 *1.44@1214.501,438.15 *1.44@1214.501,441.198 *1.44@1214.501,444.246
  Bottom Layer w0.254: v2(1214.501,399.923) 1214.755,400.177 38.16@1214.755,405.131
Net*1_45: 38.15 *1.45 | length 53.1
  Top Layer w0.762: *1.45@1219.073,398.526 *1.45@1219.073,401.574 *1.45@1219.073,404.622 *1.45@1219.073,407.67 *1.45@1219.073,410.718 *1.45@1219.073,413.766 *1.45@1219.073,416.814 *1.45@1219.073,419.862 *1.45@1219.073,422.91 *1.45@1219.073,425.958 *1.45@1219.073,429.006 *1.45@1219.073,432.054 *1.45@1219.073,435.102 *1.45@1219.073,438.15 *1.45@1219.073,441.198 *1.45@1219.073,444.246
  Bottom Layer w0.254: 38.15@1216.025,405.131 1216.025,401.32 1217.295,400.05 v2(1219.073,400.05)
Net*1_46: 38.14 *1.46 | length 55.7
  Top Layer w0.762: *1.46@1223.645,398.526 *1.46@1223.645,401.574 *1.46@1223.645,404.622 *1.46@1223.645,407.67 *1.46@1223.645,410.718 *1.46@1223.645,413.766 *1.46@1223.645,416.814 *1.46@1223.645,419.862 *1.46@1223.645,422.91 *1.46@1223.645,425.958 *1.46@1223.645,429.006 *1.46@1223.645,432.054 *1.46@1223.645,435.102 *1.46@1223.645,438.15 *1.46@1223.645,441.198 *1.46@1223.645,444.246
  Bottom Layer w0.254: 38.14@1217.295,405.131 1217.295,402.59 1218.819,401.066 1222.629,401.066 v2(1223.645,400.05)
Net*1_47: 38.13 *1.47 | length 58.8
  Top Layer w0.762: *1.47@1228.344,398.526 *1.47@1228.344,401.574 *1.47@1228.344,404.622 *1.47@1228.344,407.67 *1.47@1228.344,410.718 *1.47@1228.344,413.766 *1.47@1228.344,416.814 *1.47@1228.344,419.862 *1.47@1228.344,422.91 *1.47@1228.344,425.958 *1.47@1228.344,429.006 *1.47@1228.344,432.054 *1.47@1228.344,435.102 *1.47@1228.344,438.15 *1.47@1228.344,441.198 *1.47@1228.344,444.246
  Bottom Layer w0.254: 38.13@1218.565,405.131 1218.565,403.098 1219.835,401.828 1226.566,401.828 v2(1228.344,400.05)
Net*1_48: 38.12 *1.48 | length 61.7
  Top Layer w0.762: *1.48@1232.916,398.526 *1.48@1232.916,401.574 *1.48@1232.916,404.622 *1.48@1232.916,407.67 *1.48@1232.916,410.718 *1.48@1232.916,413.766 *1.48@1232.916,416.814 *1.48@1232.916,419.862 *1.48@1232.916,422.91 *1.48@1232.916,425.958 *1.48@1232.916,429.006 *1.48@1232.916,432.054 *1.48@1232.916,435.102 *1.48@1232.916,438.15 *1.48@1232.916,441.198 *1.48@1232.916,444.246
  Bottom Layer w0.254: 38.12@1219.835,405.131 1219.835,403.733 1220.978,402.59 1230.376,402.59 v2(1232.916,400.05)
Net*1_49: 39.19 *1.49 | length 57.8
  Top Layer w0.762: *1.49@1237.615,398.78 *1.49@1237.615,404.622 *1.49@1237.615,444.5
  Bottom Layer w0.254: v2(1237.488,403.098) 1247.14,403.098 1247.775,403.733 39.19@1247.775,405.258
Net*1_50: 39.18 *1.50 | length 55.8
  Top Layer w0.762: *1.50@1242.187,398.78 *1.50@1242.187,401.574 *1.50@1242.187,404.622 1242.187,423.164 *1.50@1242.187,444.5
  Bottom Layer w0.254: v2(1242.187,400.05) 1243.965,401.828 1247.394,401.828 1249.045,403.479 39.18@1249.045,405.258
Net*1_51: 39.17 *1.51 | length 52.6
  Top Layer w0.762: *1.51@1246.886,398.78 *1.51@1246.886,401.574 *1.51@1246.886,404.622 *1.51@1246.886,444.5
  Bottom Layer w0.254: v2(1246.759,400.05) 1247.14,400.05 1250.315,403.225 39.17@1250.315,405.258
Net*1_52: 39.16 *1.52 | length 51
  Top Layer w0.762: *1.52@1251.458,398.78 *1.52@1251.458,401.574 *1.52@1251.458,404.622 *1.52@1251.458,407.67 *1.52@1251.458,444.5
  Bottom Layer w0.254: v2(1251.458,400.05) 1251.585,400.177 39.16@1251.585,405.258
Net*1_53: 39.15 *1.53 | length 53.3
  Top Layer w0.762: *1.53@1256.03,398.78 *1.53@1256.03,401.574 *1.53@1256.03,444.5
  Bottom Layer w0.254: 39.15@1252.855,405.258 1252.855,401.447 1254.252,400.05 v2(1256.03,400.05)
Net*1_54: 39.14 *1.54 | length 56
  Top Layer w0.762: *1.54@1260.602,398.78 *1.54@1260.602,401.574 *1.54@1260.602,444.5
  Bottom Layer w0.254: 39.14@1254.125,405.258 1254.125,402.463 1255.649,400.939 1259.713,400.939 v2(1260.602,400.05)
Net*1_55: 39.13 *1.55 | length 58.8
  Top Layer w0.762: *1.55@1265.301,398.78 *1.55@1265.301,401.574 *1.55@1265.301,404.622 1265.301,435.356 *1.55@1265.301,444.5
  Bottom Layer w0.254: 39.13@1255.395,405.258 1255.395,403.352 1256.919,401.828 1263.65,401.828 v2(1265.301,400.177)
Net*1_56: 39.12 *1.56 | length 60.6
  Top Layer w0.762: *1.56@1269.873,398.78 *1.56@1269.873,404.622 *1.56@1269.873,444.5
  Bottom Layer w0.254: 39.12@1256.665,405.258 1256.665,403.987 1257.554,403.098 v2(1269.873,403.098)
Net*1_57: 40.19 *1.57 | length 57.5
  Top Layer w0.762: *1.57@1274.445,398.653 *1.57@1274.445,404.622 *1.57@1274.445,444.373
  Bottom Layer w0.254: v2(1274.445,403.098) 1283.589,403.098 1284.732,404.241 40.19@1284.732,405.258
Net*1_58: 40.18 *1.58 | length 74.2
  Top Layer w0.762: *1.58@1279.017,398.653 *1.58@1279.017,401.574 *1.58@1279.017,404.622 *1.58@1279.017,407.67 *1.58@1279.017,410.718 *1.58@1279.017,413.893 ; *1.58@1279.017,416.941 *1.58@1279.017,413.893 ; *1.58@1279.017,419.989 *1.58@1279.017,413.893 ; *1.58@1279.017,429.133 *1.58@1279.017,435.229 ; *1.58@1279.017,432.181 *1.58@1279.017,435.229 ; *1.58@1279.017,444.373 *1.58@1279.017,435.229 ; *1.58@1279.017,413.893 *1.58@1279.017,435.229
  Bottom Layer w0.254: v2(1279.017,400.05) 1281.176,402.209 1284.732,402.209 1286.002,403.479 40.18@1286.002,405.258
Net*1_59: 40.17 *1.59 | length 81
  Top Layer w0.762: *1.59@1283.716,398.653 *1.59@1283.716,401.574 *1.59@1283.716,401.701 ; *1.59@1283.716,404.749 *1.59@1283.716,401.701 ; *1.59@1283.716,407.797 *1.59@1283.716,401.701 ; *1.59@1283.716,416.941 *1.59@1283.716,413.893 ; *1.59@1283.716,419.989 *1.59@1283.716,413.893 ; *1.59@1283.716,429.133 *1.59@1283.716,435.229 ; *1.59@1283.716,432.181 *1.59@1283.716,435.229 ; *1.59@1283.716,444.373 *1.59@1283.716,435.229 ; *1.59@1283.716,401.701 *1.59@1283.716,413.893 ; *1.59@1283.716,413.893 *1.59@1283.716,435.229
  Bottom Layer w0.254: v2(1283.716,399.923) 1285.494,399.923 1287.272,401.701 40.17@1287.272,405.258
Net*1_60: 40.16 *1.60 | length 69.4
  Top Layer w0.762: *1.60@1288.288,398.653 *1.60@1288.288,401.574 *1.60@1288.288,404.622 *1.60@1288.288,407.67 *1.60@1288.288,413.893 ; *1.60@1288.288,416.941 *1.60@1288.288,413.893 ; *1.60@1288.288,419.989 *1.60@1288.288,413.893 ; *1.60@1288.288,429.133 *1.60@1288.288,435.229 ; *1.60@1288.288,432.181 *1.60@1288.288,435.229 ; *1.60@1288.288,444.373 *1.60@1288.288,435.229 ; *1.60@1288.288,413.893 *1.60@1288.288,435.229
  Bottom Layer w0.254: v2(1288.288,399.923) 1288.542,400.177 40.16@1288.542,405.258
Net*1_61: 40.15 *1.61 | length 71.5
  Top Layer w0.762: *1.61@1292.86,398.653 *1.61@1292.86,401.574 *1.61@1292.86,401.701 ; *1.61@1292.86,404.622 *1.61@1292.86,401.701 ; *1.61@1292.86,413.766 *1.61@1292.86,410.845 ; *1.61@1292.86,416.814 *1.61@1292.86,416.941 ; *1.61@1292.86,422.91 *1.61@1292.86,419.989 ; *1.61@1292.86,429.006 *1.61@1292.86,426.085 ; *1.61@1292.86,444.373 *1.61@1292.86,432.054 *1.61@1292.86,426.085 ; *1.61@1292.86,401.701 *1.61@1292.86,407.67 *1.61@1292.86,407.797 ; *1.61@1292.86,407.797 *1.61@1292.86,410.718 *1.61@1292.86,410.845 ; *1.61@1292.86,407.797 *1.61@1292.86,410.845 ; *1.61@1292.86,410.845 *1.61@1292.86,416.941 ; *1.61@1292.86,416.941 *1.61@1292.86,419.862 *1.61@1292.86,419.989 ; *1.61@1292.86,416.941 *1.61@1292.86,419.989 ; *1.61@1292.86,419.989 *1.61@1292.86,425.958 *1.61@1292.86,426.085
  Bottom Layer w0.254: 40.15@1289.812,405.258 1289.812,400.685 1290.447,400.05 v2(1292.86,400.05)
Net*1_62: 40.14 *1.62 | length 67.5
  Top Layer w0.762: *1.62@1297.432,398.653 *1.62@1297.432,401.574 *1.62@1297.432,404.622 *1.62@1297.432,404.749 ; *1.62@1297.432,407.797 *1.62@1297.432,404.749 ; *1.62@1297.432,429.133 *1.62@1297.432,435.229 ; *1.62@1297.432,432.181 *1.62@1297.432,435.229 ; *1.62@1297.432,444.373 *1.62@1297.432,435.229 ; *1.62@1297.432,404.749 *1.62@1297.432,435.229
  Bottom Layer w0.254: 40.14@1291.082,405.258 1291.082,403.479 1293.114,401.447 1295.908,401.447 v2(1297.432,399.923)
Net*1_63: 40.13 *1.63 | length 58.4
  Top Layer w0.762: *1.63@1302.131,398.653 *1.63@1302.131,401.574 *1.63@1302.131,444.373
  Bottom Layer w0.254: 40.13@1292.352,405.258 1292.352,403.987 1294.003,402.336 1297.051,402.336 1299.337,400.05 v2(1302.131,400.05)
Net*1_64: 40.12 *1.64 | length 60.1
  Top Layer w0.762: *1.64@1306.703,398.653 *1.64@1306.703,404.622 *1.64@1306.703,444.373
  Bottom Layer w0.254: 40.12@1293.622,405.258 1293.622,404.622 1295.146,403.098 v2(1306.703,403.098)
Net*1_81: 8.19 *1.81 | length 68.6
  Top Layer w0.762: *1.81@1016.381,447.294 *1.81@1016.381,450.342 *1.81@1016.381,453.39 *1.81@1016.381,456.438 *1.81@1016.381,459.486 *1.81@1016.381,462.534 *1.81@1016.381,465.582 *1.81@1016.381,468.63 *1.81@1016.381,471.678 *1.81@1016.381,474.726 *1.81@1016.381,477.774 *1.81@1016.381,480.822 *1.81@1016.381,483.87 *1.81@1016.381,486.918 *1.81@1016.381,489.966 *1.81@1016.381,493.014
  Bottom Layer w0.254: v2(1016.381,480.695) 1017.397,481.711 1031.875,481.711 1035.558,485.394 8.19@1035.558,487.171
Net*1_82: 8.18 *1.82 | length 62.2
  Top Layer w0.762: *1.82@1020.953,447.294 *1.82@1020.953,450.342 *1.82@1020.953,453.39 *1.82@1020.953,456.438 *1.82@1020.953,459.486 *1.82@1020.953,462.534 *1.82@1020.953,465.582 *1.82@1020.953,468.63 *1.82@1020.953,471.678 *1.82@1020.953,474.726 *1.82@1020.953,477.774 *1.82@1020.953,480.822 *1.82@1020.953,483.87 *1.82@1020.953,486.918 *1.82@1020.953,489.966 *1.82@1020.953,493.014
  Bottom Layer w0.254: v2(1020.953,482.346) 1022.477,482.346 1023.366,483.235 1032.383,483.235 1034.288,485.14 8.18@1034.288,487.171
Net*1_83: 8.17 *1.83 | length 56.3
  Top Layer w0.762: *1.83@1025.652,447.294 *1.83@1025.652,450.342 *1.83@1025.652,453.39 *1.83@1025.652,456.438 *1.83@1025.652,459.486 *1.83@1025.652,462.534 *1.83@1025.652,465.582 *1.83@1025.652,468.63 *1.83@1025.652,471.678 *1.83@1025.652,474.726 *1.83@1025.652,477.774 *1.83@1025.652,480.822 *1.83@1025.652,483.87 *1.83@1025.652,486.918 *1.83@1025.652,489.966 *1.83@1025.652,493.014
  Bottom Layer w0.254: v2(1025.652,485.394) 1027.176,483.87 1031.875,483.87 1033.018,485.013 8.17@1033.018,487.171
Net*1_84: 8.16 *1.84 | length 48.7
  Top Layer w0.762: *1.84@1030.224,447.294 *1.84@1030.224,450.342 *1.84@1030.224,453.39 *1.84@1030.224,456.438 *1.84@1030.224,459.486 *1.84@1030.224,462.534 *1.84@1030.224,465.582 *1.84@1030.224,468.63 *1.84@1030.224,471.678 *1.84@1030.224,474.726 *1.84@1030.224,477.774 *1.84@1030.224,480.822 *1.84@1030.224,483.87 *1.84@1030.224,486.918 *1.84@1030.224,489.966 *1.84@1030.224,493.014
  Bottom Layer w0.254: v2(1030.224,485.394) 1031.24,485.394 1031.748,485.902 8.16@1031.748,487.171
Net*1_85: 8.15 *1.85 | length 51.1
  Top Layer w0.762: *1.85@1034.796,447.294 *1.85@1034.796,450.342 *1.85@1034.796,453.39 *1.85@1034.796,456.438 *1.85@1034.796,459.486 *1.85@1034.796,462.534 *1.85@1034.796,465.582 *1.85@1034.796,468.63 *1.85@1034.796,471.678 *1.85@1034.796,474.726 *1.85@1034.796,477.774 *1.85@1034.796,480.822 *1.85@1034.796,483.87 *1.85@1034.796,486.918 *1.85@1034.796,489.966 *1.85@1034.796,493.014
  Bottom Layer w0.254: 8.15@1030.478,487.171 1030.478,487.934 1031.113,488.569 v2(1034.796,488.569)
Net*1_86: 8.14 *1.86 | length 58.4
  Top Layer w0.762: *1.86@1039.368,447.294 *1.86@1039.368,450.342 *1.86@1039.368,453.39 *1.86@1039.368,456.438 *1.86@1039.368,459.486 *1.86@1039.368,462.534 *1.86@1039.368,465.582 *1.86@1039.368,468.63 *1.86@1039.368,471.678 *1.86@1039.368,474.726 *1.86@1039.368,477.774 *1.86@1039.368,480.822 *1.86@1039.368,483.87 *1.86@1039.368,486.918 *1.86@1039.368,489.966 *1.86@1039.368,493.014
  Bottom Layer w0.254: 8.14@1029.208,487.171 1029.208,488.569 1030.605,489.966 1037.971,489.966 v2(1039.368,488.569)
Net*1_87: 8.13 *1.87 | length 64.6
  Top Layer w0.762: *1.87@1044.067,447.294 *1.87@1044.067,450.342 *1.87@1044.067,453.39 *1.87@1044.067,456.438 *1.87@1044.067,459.486 *1.87@1044.067,462.534 *1.87@1044.067,465.582 *1.87@1044.067,468.63 *1.87@1044.067,471.678 *1.87@1044.067,474.726 *1.87@1044.067,477.774 *1.87@1044.067,480.822 *1.87@1044.067,483.87 *1.87@1044.067,486.918 *1.87@1044.067,489.966 *1.87@1044.067,493.014
  Bottom Layer w0.254: 8.13@1027.938,487.171 1027.938,488.823 1030.478,491.363 v2(1044.067,491.363)
Net*1_88: 8.12 *1.88 | length 72.4
  Top Layer w0.762: *1.88@1048.639,447.294 *1.88@1048.639,450.342 *1.88@1048.639,453.39 *1.88@1048.639,456.438 *1.88@1048.639,459.486 *1.88@1048.639,462.534 *1.88@1048.639,465.582 *1.88@1048.639,468.63 *1.88@1048.639,471.678 *1.88@1048.639,474.726 *1.88@1048.639,477.774 *1.88@1048.639,480.822 *1.88@1048.639,483.87 *1.88@1048.639,486.918 *1.88@1048.639,489.966 *1.88@1048.639,493.014
  Bottom Layer w0.254: 8.12@1026.668,487.171 1026.668,489.966 1029.716,493.014 1047.115,493.014 v2(1048.639,491.49)
Net*1_89: 7.19 *1.89 | length 69.4
  Top Layer w0.762: *1.89@1053.211,447.167 *1.89@1053.211,480.822 *1.89@1053.211,492.887
  Bottom Layer w0.254: v2(1053.211,482.092) 1071.499,482.092 1072.642,483.235 7.19@1072.642,487.044
Net*1_90: 7.18 *1.90 | length 63
  Top Layer w0.762: *1.90@1057.783,447.167 *1.90@1057.783,480.822 *1.90@1057.783,492.887
  Bottom Layer w0.254: v2(1057.783,482.727) 1070.356,482.727 1071.372,483.743 7.18@1071.372,487.044
Net*1_91: 7.17 *1.91 | length 57
  Top Layer w0.762: *1.91@1062.482,447.167 *1.91@1062.482,480.822 *1.91@1062.482,483.87 *1.91@1062.482,492.887
  Bottom Layer w0.254: v2(1062.482,485.267) 1064.26,483.489 1069.086,483.489 1070.102,484.505 7.17@1070.102,487.044
Net*1_92: 7.16 *1.92 | length 49
  Top Layer w0.762: *1.92@1067.054,447.167 1067.054,468.503 *1.92@1067.054,483.87 *1.92@1067.054,492.887
  Bottom Layer w0.254: 1067.054,485.394 1068.578,485.394 1068.832,485.648 7.16@1068.832,487.044